# EAGLE board QFP50-bo (EAGLE 5.11)
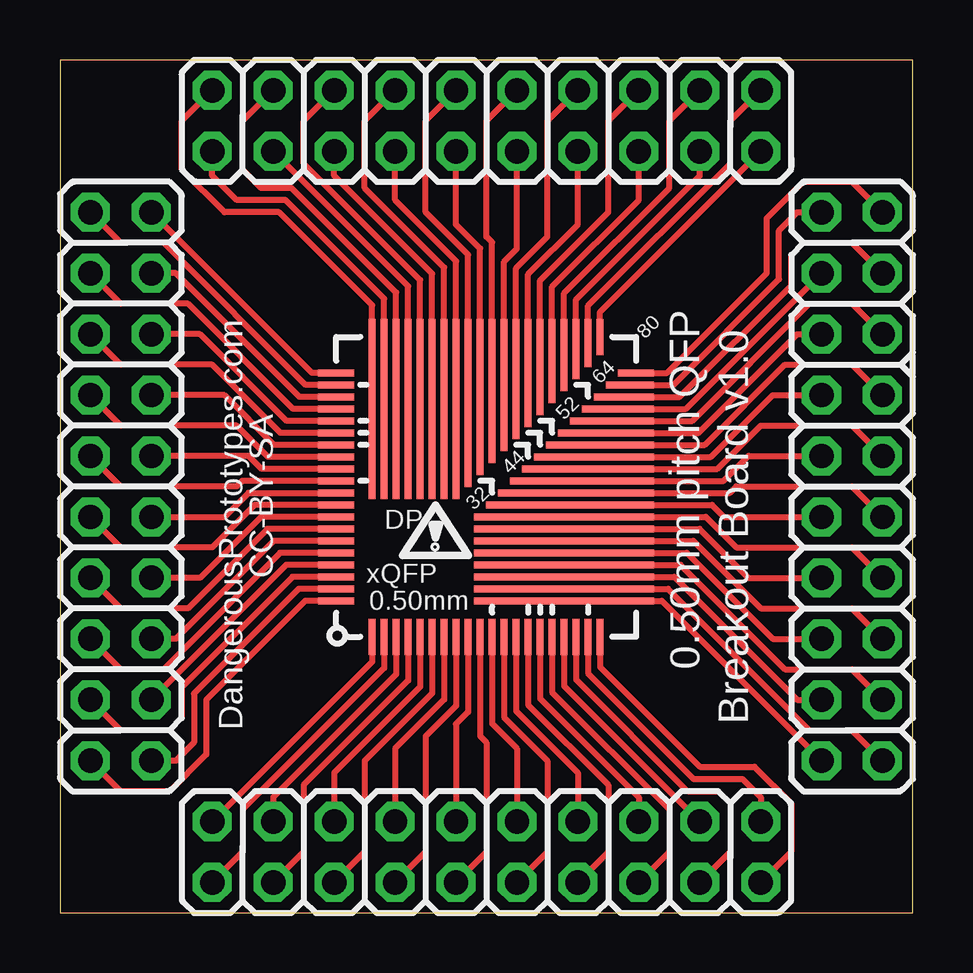
[diagram p0: board, top side]
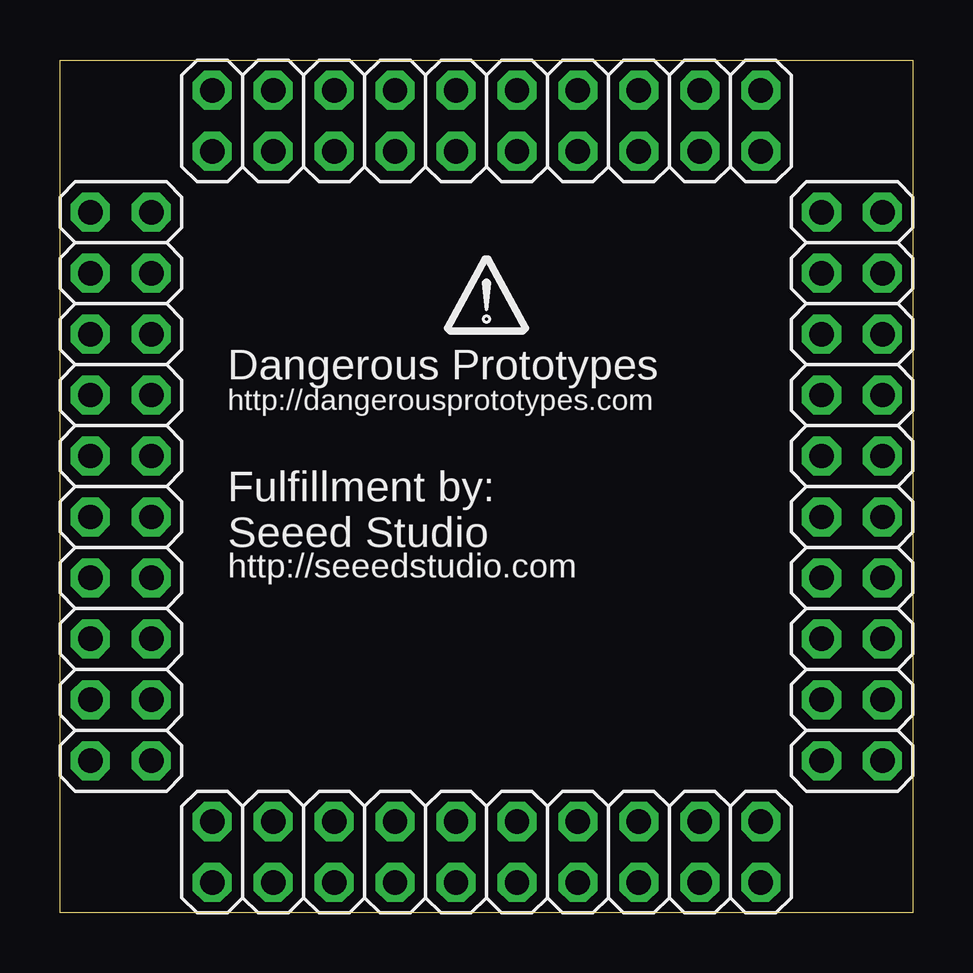
[diagram p1: board, bottom side, seen from below]

Size 35.56 x 35.56 mm. Coordinates in mm from the lower left corner, seen from the top.
Outline: 0,0 35.56,0 35.56,35.56 0,35.56 0,0
Copper layers (1*16): Top 0.035mm / dielectric 1.5mm / Bottom 0.035mm
Design rules "SparkFun *": minimum track width 8mil, minimum drill 20mil, track to track 8mil, track to pad 6mil, pad to pad 6mil, via to via 8mil, smd to smd 6mil, copper to edge 10mil, drill to drill 8mil, minimum pad ring 12mil, minimum via ring 10mil, stop-mask expansion 4mil, vias tented up to drill 25mil, thermal gap 10mil

## Footprints (pad centres in the part's own frame; a part is rotated, then mirrored left to right if it is on the bottom)
2X10 = drill 1.016 octagon: 1 -11.43,-1.27; 2 -11.43,1.27; 3 -8.89,-1.27; 4 -8.89,1.27; 5 -6.35,-1.27; 6 -6.35,1.27; 7 -3.81,-1.27; 8 -3.81,1.27; 9 -1.27,-1.27; 10 -1.27,1.27; 11 1.27,-1.27; 12 1.27,1.27; 13 3.81,-1.27; 14 3.81,1.27; 15 6.35,-1.27; 16 6.35,1.27; 17 8.89,-1.27; 18 8.89,1.27; 19 11.43,-1.27; 20 11.43,1.27
BB_QFP_050 = smd 0.3 x 1.5: 1 -3.75,-5.25; 2 -3.25,-5.25; 3 -2.75,-5.25; 4 -2.25,-5.25; 5 -1.75,-5.25; 6 -1.25,-5.25; 7 -0.75,-5.25; 8 -0.25,-5.25; 9 0.25,-5.25; 10 0.75,-5.25; 11 1.25,-5.25; 12 1.75,-5.25; 13 2.25,-5.25; 14 2.75,-5.25; 15 3.25,-5.25; 16 3.75,-5.25; 17 4.25,-5.25; 18 4.75,-5.25; 19 5.25,-5.25; 20 5.75,-5.25; 41 5.75,7.25 | smd 7.5 x 0.3: 21 4.25,-3.75; 22 4.25,-3.25; 23 4.25,-2.75; 24 4.25,-2.25; 25 4.25,-1.75; 26 4.25,-1.25; 27 4.25,-0.75; 28 4.25,-0.25 | smd 7 x 0.3: 29 4.5,0.25 | smd 6.5 x 0.3: 30 4.75,0.75 | smd 6 x 0.3: 31 5,1.25 | smd 5.5 x 0.3: 32 5.25,1.75 | smd 5 x 0.3: 33 5.5,2.25 | smd 4.5 x 0.3: 34 5.75,2.75 | smd 4 x 0.3: 35 6,3.25 | smd 3.5 x 0.3: 36 6.25,3.75 | smd 3 x 0.3: 37 6.5,4.25 | smd 2.5 x 0.3: 38 6.75,4.75 | smd 2 x 0.3: 39 7,5.25 | smd 1.5 x 0.3: 40 7.25,5.75; 61 -5.25,5.75; 62 -5.25,5.25; 63 -5.25,4.75; 64 -5.25,4.25; 65 -5.25,3.75; 66 -5.25,3.25; 67 -5.25,2.75; 68 -5.25,2.25; 69 -5.25,1.75; 70 -5.25,1.25; 71 -5.25,0.75; 72 -5.25,0.25; 73 -5.25,-0.25; 74 -5.25,-0.75; 75 -5.25,-1.25; 76 -5.25,-1.75; 77 -5.25,-2.25; 78 -5.25,-2.75; 79 -5.25,-3.25; 80 -5.25,-3.75 | smd 0.3 x 2: 42 5.25,7 | smd 0.3 x 2.5: 43 4.75,6.75 | smd 0.3 x 3: 44 4.25,6.5 | smd 0.3 x 3.5: 45 3.75,6.25 | smd 0.3 x 4: 46 3.25,6 | smd 0.3 x 4.5: 47 2.75,5.75 | smd 0.3 x 5: 48 2.25,5.5 | smd 0.3 x 5.5: 49 1.75,5.25 | smd 0.3 x 6: 50 1.25,5 | smd 0.3 x 6.5: 51 0.75,4.75 | smd 0.3 x 7: 52 0.25,4.5 | smd 0.3 x 7.5: 53 -0.25,4.25; 54 -0.75,4.25; 55 -1.25,4.25; 56 -1.75,4.25; 57 -2.25,4.25; 58 -2.75,4.25; 59 -3.25,4.25; 60 -3.75,4.25

## Placement (x,y rotation side)
JP1  [2X10]  17.78,2.54 180 bottom
JP2  [2X10]  33.02,17.78 90 bottom
JP3  [2X10]  17.78,33.02 0 bottom
JP4  [2X10]  2.54,17.78 270 bottom
U$1  BB_XQFP_050  [BB_QFP_050]  16.76,16.76 0 top
U$2  [DP_LOGO]  17.78,24.77 0 bottom

## Library data of the parts
JP1-JP4 = pinhead
U$1 = DP_protoboard
U$2 = dp_devices

## Nets
N$1: JP1.1 U$1.1
N$2: JP1.2 U$1.2
N$3: JP1.3 U$1.3
N$4: JP1.4 U$1.4
N$5: JP1.5 U$1.5
N$6: JP1.6 U$1.6
N$7: JP1.7 U$1.7
N$8: JP1.8 U$1.8
N$9: JP1.9 U$1.9
N$10: JP1.10 U$1.10
N$11: JP1.11 U$1.11
N$12: JP1.12 U$1.12
N$13: JP1.13 U$1.13
N$14: JP1.14 U$1.14
N$15: JP1.15 U$1.15
N$16: JP1.16 U$1.16
N$17: JP1.17 U$1.17
N$18: JP1.18 U$1.18
N$19: JP1.19 U$1.19
N$20: JP1.20 U$1.20
N$21: JP2.1 U$1.21
N$22: JP2.2 U$1.22
N$23: JP2.3 U$1.23
N$24: JP2.4 U$1.24
N$25: JP2.5 U$1.25
N$26: JP2.6 U$1.26
N$27: JP2.7 U$1.27
N$28: JP2.8 U$1.28
N$29: JP2.9 U$1.29
N$30: JP2.10 U$1.30
N$31: JP2.11 U$1.31
N$32: JP2.12 U$1.32
N$33: JP2.13 U$1.33
N$34: JP2.14 U$1.34
N$35: JP2.15 U$1.35
N$36: JP2.16 U$1.36
N$37: JP2.17 U$1.37
N$38: JP2.18 U$1.38
N$39: JP2.19 U$1.39
N$40: JP2.20 U$1.40
N$41: JP3.1 U$1.41
N$42: JP3.2 U$1.42
N$43: JP3.3 U$1.43
N$44: JP3.4 U$1.44
N$45: JP3.5 U$1.45
N$46: JP3.6 U$1.46
N$47: JP3.7 U$1.47
N$48: JP3.8 U$1.48
N$49: JP3.9 U$1.49
N$50: JP3.10 U$1.50
N$51: JP3.11 U$1.51
N$52: JP3.12 U$1.52
N$53: JP3.13 U$1.53
N$54: JP3.14 U$1.54
N$55: JP3.15 U$1.55
N$56: JP3.16 U$1.56
N$57: JP3.17 U$1.57
N$58: JP3.18 U$1.58
N$59: JP3.19 U$1.59
N$60: JP3.20 U$1.60
N$61: JP4.1 U$1.61
N$62: JP4.2 U$1.62
N$63: JP4.3 U$1.63
N$64: JP4.4 U$1.64
N$65: JP4.5 U$1.65
N$66: JP4.6 U$1.66
N$67: JP4.7 U$1.67
N$68: JP4.8 U$1.68
N$69: JP4.9 U$1.69
N$70: JP4.10 U$1.70
N$71: JP4.11 U$1.71
N$72: JP4.12 U$1.72
N$73: JP4.13 U$1.73
N$74: JP4.14 U$1.74
N$75: JP4.15 U$1.75
N$76: JP4.16 U$1.76
N$77: JP4.17 U$1.77
N$78: JP4.18 U$1.78
N$79: JP4.19 U$1.79
N$80: JP4.20 U$1.80

## Tracks (layer width: path | path; a pad name or v marks a point on that pad's centre or on a via)
N$1
  Top 0.254: U$1.1 13.01,10.47 JP1.1
N$2
  Top 0.254: U$1.2 13.51,10.21 7.62,4.32 7.62,2.54 JP1.2
N$3
  Top 0.254: U$1.3 14.01,9.95 8.89,4.83 JP1.3
N$4
  Top 0.254: U$1.4 14.51,9.69 10.16,5.33 10.16,2.54 JP1.4
N$5
  Top 0.254: U$1.5 15.01,9.43 11.43,5.84 JP1.5
N$6
  Top 0.254: U$1.6 15.51,9.16 12.7,6.35 12.7,2.54 JP1.6
N$7
  Top 0.254: U$1.7 16.01,8.9 13.97,6.86 JP1.7
N$8
  Top 0.254: U$1.8 16.51,8.64 15.24,7.37 15.24,2.54 JP1.8
N$9
  Top 0.254: U$1.9 17.01,8.38 16.51,7.87 JP1.9
N$10
  Top 0.254: U$1.10 17.51,7.38 17.78,7.11 17.78,2.54 JP1.10
N$11
  Top 0.254: U$1.11 18.01,7.89 19.05,6.86 JP1.11
N$12
  Top 0.254: U$1.12 18.51,8.16 20.32,6.35 20.32,2.54 JP1.12
N$13
  Top 0.254: U$1.13 19.01,8.42 21.59,5.84 JP1.13
N$14
  Top 0.254: U$1.14 19.51,8.68 22.86,5.33 22.86,2.54 JP1.14
N$15
  Top 0.254: U$1.15 20.01,8.94 24.13,4.83 JP1.15
N$16
  Top 0.254: U$1.16 20.51,9.2 25.4,4.32 25.4,2.54 JP1.16
N$17
  Top 0.254: U$1.17 21.01,9.47 JP1.17
N$18
  Top 0.254: U$1.18 21.51,9.73 26.16,5.08 27.43,5.08 27.94,4.57 27.94,2.54 JP1.18
N$19
  Top 0.254: U$1.19 22.01,9.99 26.42,5.59 28.45,5.59 29.21,4.83 JP1.19
N$20
  Top 0.254: U$1.20 22.51,10.25 26.67,6.1 28.96,6.1 30.48,4.57 30.48,2.54 JP1.20
N$21
  Top 0.254: U$1.21 25.09,13.01 JP2.1
N$22
  Top 0.254: U$1.22 25.35,13.51 31.24,7.62 33.02,7.62 JP2.2
N$23
  Top 0.254: U$1.23 25.61,14.01 30.73,8.89 JP2.3
N$24
  Top 0.254: U$1.24 25.87,14.51 30.23,10.16 33.02,10.16 JP2.4
N$25
  Top 0.254: U$1.25 26.13,15.01 29.72,11.43 JP2.5
N$26
  Top 0.254: U$1.26 26.4,15.51 29.21,12.7 33.02,12.7 JP2.6
N$27
  Top 0.254: U$1.27 26.66,16.01 28.7,13.97 JP2.7
N$28
  Top 0.254: U$1.28 26.92,16.51 28.19,15.24 33.02,15.24 JP2.8
N$29
  Top 0.254: U$1.29 27.18,17.01 27.69,16.51 JP2.9
N$30
  Top 0.254: U$1.30 27.93,17.51 28.19,17.78 33.02,17.78 JP2.10
N$31
  Top 0.254: U$1.31 27.67,18.01 28.7,19.05 JP2.11
N$32
  Top 0.254: U$1.32 27.4,18.51 29.21,20.32 33.02,20.32 JP2.12
N$33
  Top 0.254: U$1.33 27.14,19.01 29.72,21.59 JP2.13
N$34
  Top 0.254: U$1.34 26.88,19.51 30.23,22.86 33.02,22.86 JP2.14
N$35
  Top 0.254: U$1.35 26.62,20.01 30.73,24.13 JP2.15
N$36
  Top 0.254: U$1.36 26.36,20.51 31.24,25.4 33.02,25.4 JP2.16
N$37
  Top 0.254: U$1.37 26.09,21.01 JP2.17
N$38
  Top 0.254: U$1.38 25.83,21.51 30.48,26.16 30.48,27.43 30.99,27.94 33.02,27.94 JP2.18
N$39
  Top 0.254: U$1.39 25.57,22.01 29.97,26.42 29.97,28.45 30.73,29.21 JP2.19
N$40
  Top 0.254: U$1.40 25.31,22.51 29.46,26.67 29.46,28.96 30.99,30.48 33.02,30.48 JP2.20
N$41
  Top 0.254: U$1.41 22.51,25.05 JP3.1
N$42
  Top 0.254: U$1.42 22.01,25.32 27.94,31.24 27.94,33.02 JP3.2
N$43
  Top 0.254: U$1.43 21.51,25.58 26.67,30.73 JP3.3
N$44
  Top 0.254: U$1.44 21.01,25.84 25.4,30.23 25.4,33.02 JP3.4
N$45
  Top 0.254: U$1.45 20.51,26.1 24.13,29.72 JP3.5
N$46
  Top 0.254: U$1.46 20.01,26.36 22.86,29.21 22.86,33.02 JP3.6
N$47
  Top 0.254: U$1.47 19.51,26.63 21.59,28.7 JP3.7
N$48
  Top 0.254: U$1.48 19.01,26.89 20.32,28.19 20.32,33.02 JP3.8
N$49
  Top 0.254: U$1.49 18.51,27.15 19.05,27.69 JP3.9
N$50
  Top 0.254: U$1.50 18.01,27.96 17.78,28.19 17.78,33.02 JP3.10
N$51
  Top 0.254: U$1.51 17.51,27.7 16.51,28.7 JP3.11
N$52
  Top 0.254: U$1.52 17.01,27.44 15.24,29.21 15.24,33.02 JP3.12
N$53
  Top 0.254: U$1.53 16.51,27.17 13.97,29.72 JP3.13
N$54
  Top 0.254: U$1.54 16.01,26.91 12.7,30.23 12.7,33.02 JP3.14
N$55
  Top 0.254: U$1.55 15.51,26.65 11.43,30.73 JP3.15
N$56
  Top 0.254: U$1.56 15.01,26.39 10.16,31.24 10.16,33.02 JP3.16
N$57
  Top 0.254: U$1.57 14.51,26.13 JP3.17
N$58
  Top 0.254: U$1.58 14.01,25.86 9.65,30.23 8.38,30.23 7.62,30.99 7.62,33.02 JP3.18
N$59
  Top 0.254: U$1.59 13.51,25.6 9.4,29.72 7.37,29.72 6.35,30.73 JP3.19
N$60
  Top 0.254: U$1.60 13.01,25.34 9.14,29.21 6.86,29.21 5.08,30.99 5.08,33.02 JP3.20
N$61
  Top 0.254: U$1.61 10.51,22.51 JP4.1
N$62
  Top 0.254: U$1.62 10.24,22.01 4.32,27.94 2.54,27.94 JP4.2
N$63
  Top 0.254: U$1.63 9.98,21.51 4.83,26.67 JP4.3
N$64
  Top 0.254: U$1.64 9.72,21.01 5.33,25.4 2.54,25.4 JP4.4
N$65
  Top 0.254: U$1.65 9.46,20.51 5.84,24.13 JP4.5
N$66
  Top 0.254: U$1.66 9.2,20.01 6.35,22.86 2.54,22.86 JP4.6
N$67
  Top 0.254: U$1.67 8.93,19.51 6.86,21.59 JP4.7
N$68
  Top 0.254: U$1.68 8.67,19.01 7.37,20.32 2.54,20.32 JP4.8
N$69
  Top 0.254: U$1.69 8.41,18.51 7.87,19.05 JP4.9
N$70
  Top 0.254: U$1.70 7.6,18.01 7.37,17.78 2.54,17.78 JP4.10
N$71
  Top 0.254: U$1.71 7.86,17.51 6.86,16.51 JP4.11
N$72
  Top 0.254: U$1.72 8.12,17.01 6.35,15.24 2.54,15.24 JP4.12
N$73
  Top 0.254: U$1.73 8.39,16.51 5.84,13.97 JP4.13
N$74
  Top 0.254: U$1.74 8.65,16.01 5.33,12.7 2.54,12.7 JP4.14
N$75
  Top 0.254: U$1.75 8.91,15.51 4.83,11.43 JP4.15
N$76
  Top 0.254: U$1.76 9.17,15.01 4.32,10.16 2.54,10.16 JP4.16
N$77
  Top 0.254: U$1.77 9.43,14.51 JP4.17
N$78
  Top 0.254: U$1.78 9.7,14.01 5.08,9.4 5.08,8.13 4.57,7.62 2.54,7.62 JP4.18
N$79
  Top 0.254: U$1.79 9.96,13.51 5.59,9.14 5.59,7.11 4.83,6.35 JP4.19
N$80
  Top 0.254: U$1.80 10.22,13.01 6.1,8.89 6.1,6.6 4.57,5.08 2.54,5.08 JP4.20

## Text on the board
tNames: CC-BY-SA | 0.50mm pitch QFP | DangerousPrototypes.com | Breakout Board v1.0
bNames: Dangerous Prototypes | http://dangerousprototypes.com | Fulfillment by: | Seeed Studio | http://seeedstudio.com